# Altium PCB 2Layer_1oz_1mm_100mmX100mm_5mm_rails_2sides.PcbDoc
Units mm, origin at the board's own origin, x right, y up, seen from the top; angles counter-clockwise.
Board outline 100 x 100 mm, 2 copper layers (Top Layer, Bottom Layer), stack 0.97 mm thick; 11 components, 0 nets, 115 pads, 4 vias.
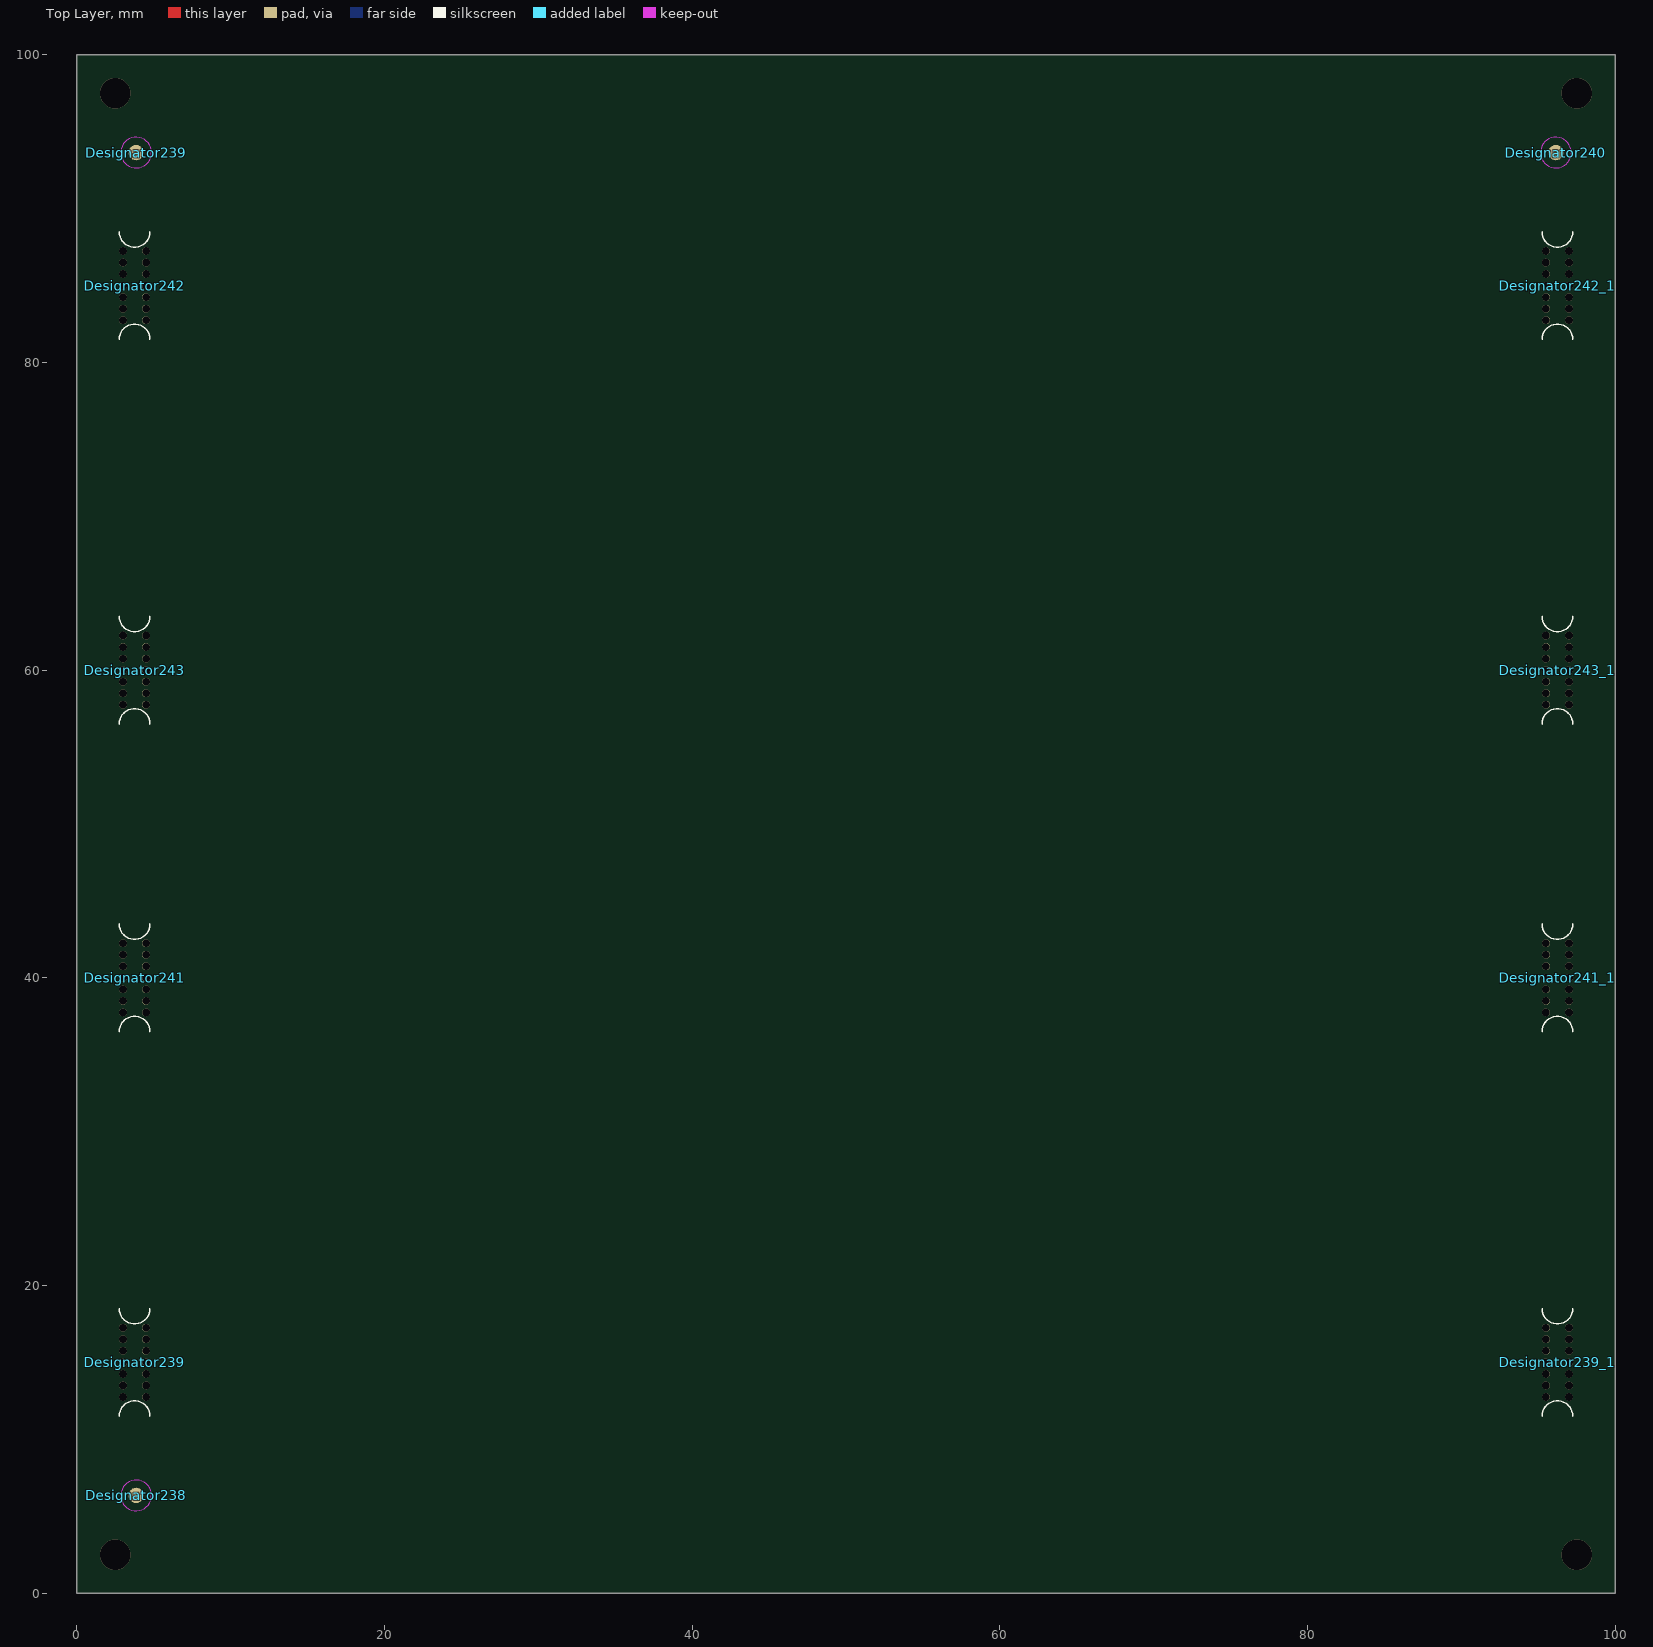
[diagram p0: Top Layer view]
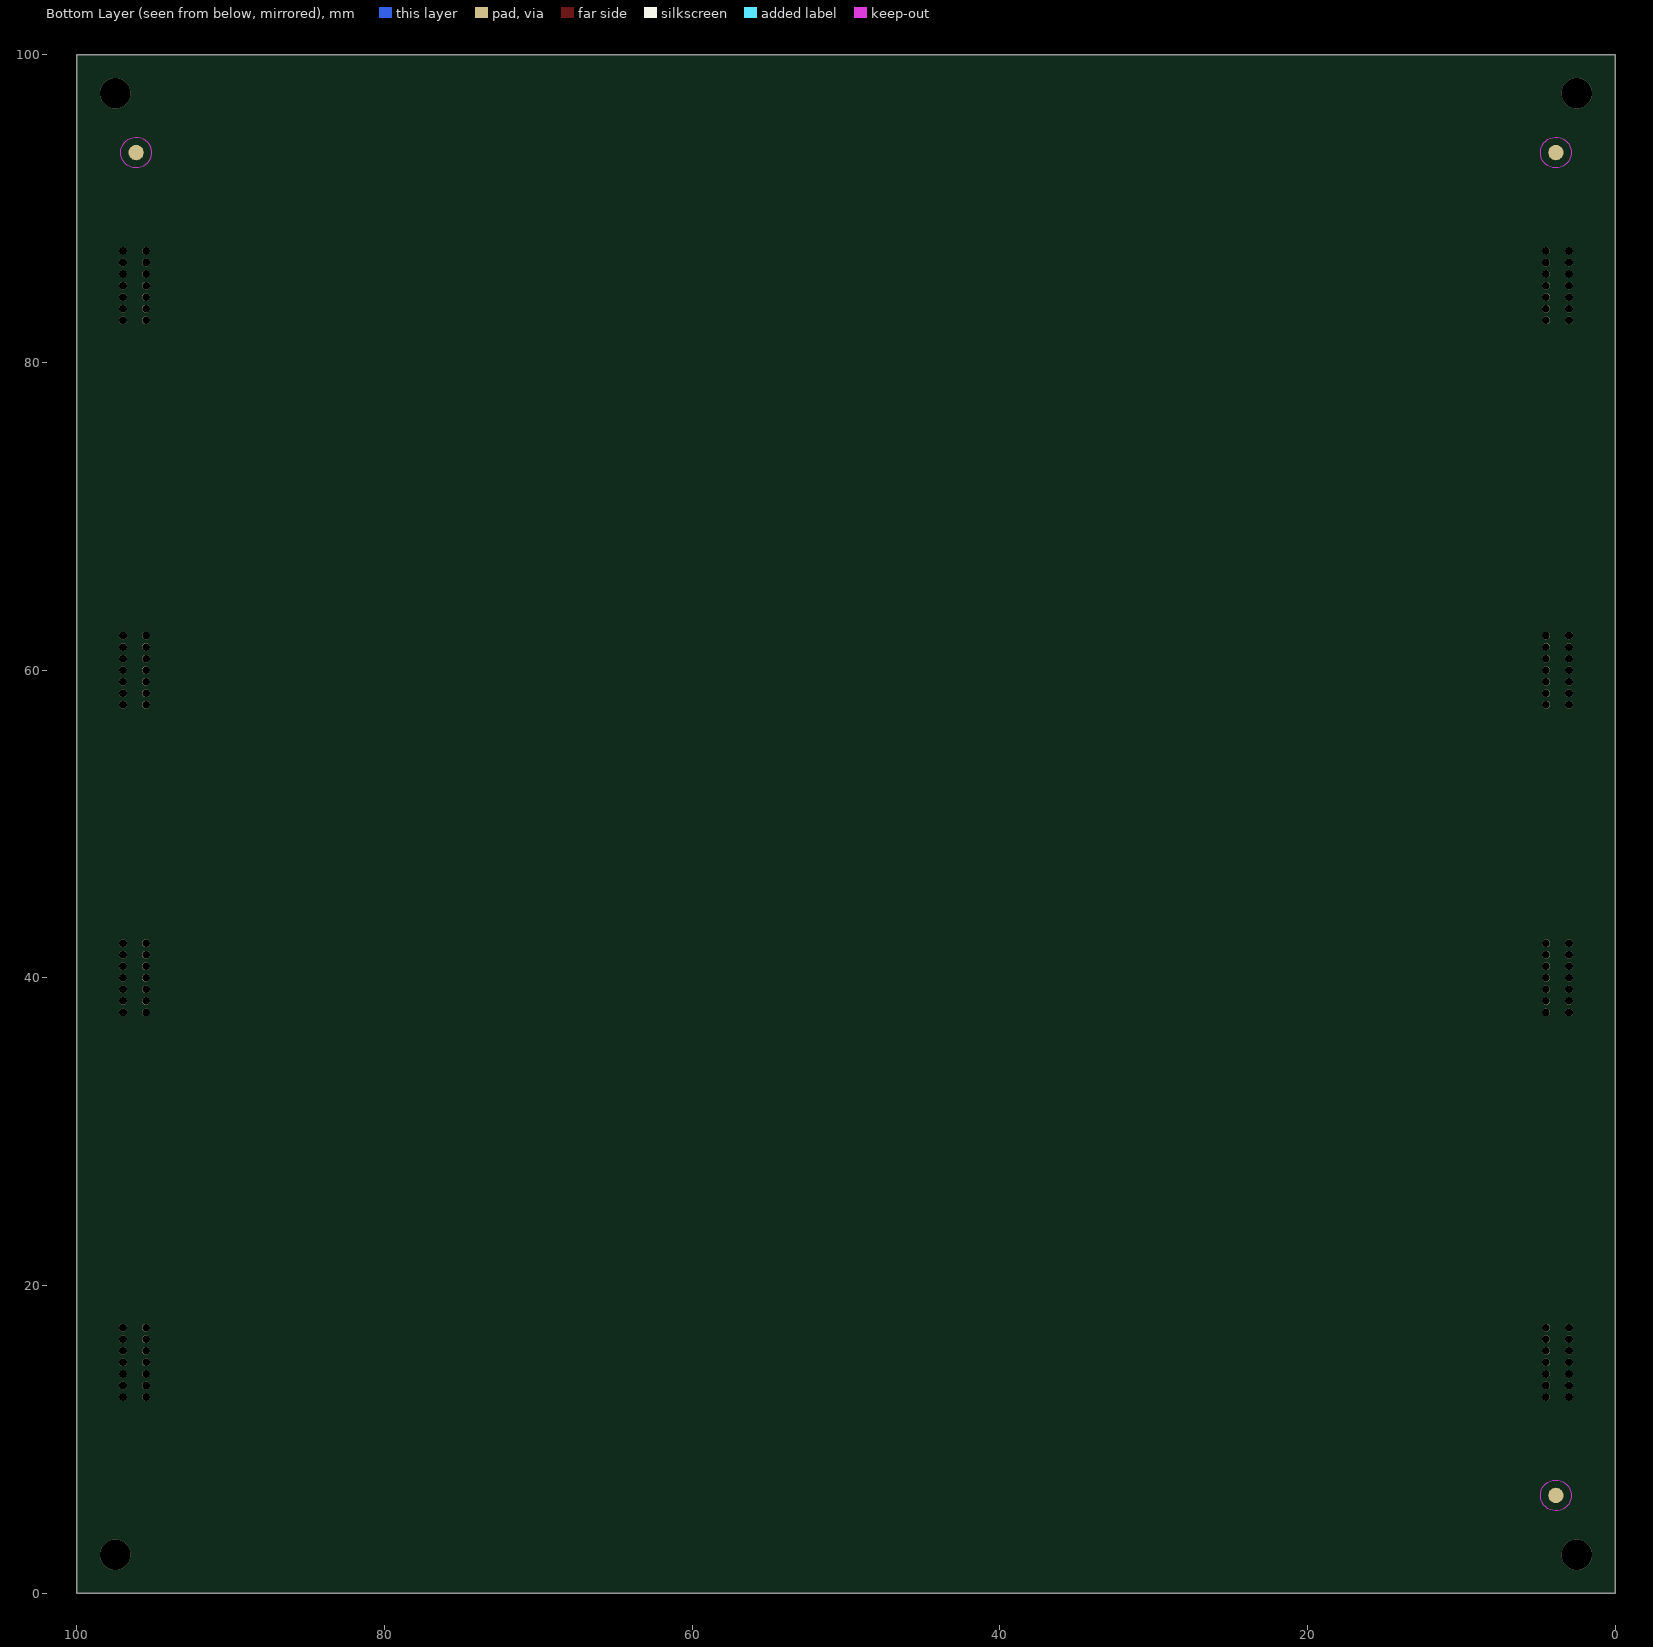
[diagram p1: Bottom Layer view, seen from below]

## Layer stack, top to bottom
Top Solder: solder mask 0.0152, Solder Resist, Dk 3.8
Top Layer: signal copper 0.035
Dielectric: core 0.9, FR-4, Dk 4.6
Bottom Layer: signal copper 0.035
Bottom Solder: solder mask 0.0152, Solder Resist, Dk 3.8

## Board outline
0,0 0,100 100,100 100,0

## Design rules (kind name [scope] priority, off if disabled: settings)
Clearance [All] p1: gap=0.254 ignorepadtopadclearanceinfootprint=FALSE except(0: Arc-Hole Track-Hole SMDPad-Hole THPad-Hole Via-Hole Fill-Hole Poly-Hole Region-Hole Text-Hole)
HoleSize [All] p1: absolutevalues=TRUE maxlimit=6.3 minlimit=0.3 maxpercent=80.000 minpercent=20.000
PolygonConnect [All] p1: connectstyle=Relief reliefconductorwidth=0.254 reliefentries=4 polygonreliefangle="90 Angle" airgapwidth=0.254
RoutingVias [All] p1: holewidth=0.711 width=1.27 viastyle="Through Hole" minholewidth=0.711 minwidth=1.27 maxholewidth=0.711 maxwidth=1.27
SolderMaskExpansion [All] p1: expansion=0.102 istentingtop=FALSE
Width [All] p1: maxlimit=0.254 minlimit=0.254 preferedwidth=0.254
29 further rules are at their usual default settings.

## Components (designator, comment, footprint, x,y, rotation, side; value= is the part's Value field where it differs from the comment)
Designator238 "Comment" FIDUCIAL_1MM_2D_MULTI_LAYER 3.85,6.35 r0 top locked
Designator239 "Comment" mouse-bite-2mm-5mm-slot 3.75,15 r270 top
Designator239 "Comment" FIDUCIAL_1MM_2D_MULTI_LAYER 3.85,93.65 r0 top locked
Designator239_1 "Comment" mouse-bite-2mm-5mm-slot 96.25,15 r270 top
Designator240 "Comment" FIDUCIAL_1MM_2D_MULTI_LAYER 96.15,93.65 r0 top locked
Designator241 "Comment" mouse-bite-2mm-5mm-slot 3.75,40 r270 top
Designator241_1 "Comment" mouse-bite-2mm-5mm-slot 96.25,40 r270 top
Designator242 "Comment" mouse-bite-2mm-5mm-slot 3.75,85 r270 top
Designator242_1 "Comment" mouse-bite-2mm-5mm-slot 96.25,85 r270 top
Designator243 "Comment" mouse-bite-2mm-5mm-slot 3.75,60 r270 top
Designator243_1 "Comment" mouse-bite-2mm-5mm-slot 96.25,60 r270 top

## Footprints (in the part's own frame and the unit in brackets; to place one, negate y for a bottom-side part, rotate by r counter-clockwise, add the part's x,y. Pads: shape width x height; smd on the part's side, far side on the other; paste and mask are expansions set on the pad)
FIDUCIAL_1MM_2D_MULTI_LAYER [mm] "1mm Pad with 0.5mm Opening(mask)"
  round 1 all layers, no hole mask+0.5: 1(0,0)
  Keep-Out Layer circle w0.01: c0,0 r1
mouse-bite-2mm-5mm-slot [mm]
  round 0.5 hole 0.5 unplated: 1(-2.25,0.75) 2(-1.5,0.75) 3(-0.75,0.75) 4(0,0.75) 5(0.75,0.75) 6(1.5,0.75) 7(2.25,0.75) 8(2.25,-0.75) 9(1.5,-0.75) 10(0.75,-0.75) 11(0,-0.75) 12(-0.75,-0.75) 13(-1.5,-0.75) 14(-2.25,-0.75)
  silkscreen extent -3.5,-1 3.5,1

## Via types
v1: diameter 2, hole 2, Top Layer to Bottom Layer, tented both sides, 4 vias

## Nets (pads, with @x,y where several pads share a name; then routed paths per layer and width w, separated by ;. In a path a pad name is that pad's centre, name@x,y a point inside that pad or via, vN(x,y) a via of type N, cw(c..) or ccw(c..) an arc to the next point about the centre after c; other vN are vias at no path point)
pads on no net: Designator238.1 Designator239.1 Designator239.2 Designator239.3 Designator239.4 Designator239.5 Designator239.6 Designator239.7 Designator239.8 Designator239.9 Designator239.10 Designator239.11 Designator239.12 Designator239.13 Designator239.14 Designator239_1.1 Designator239_1.2 Designator239_1.3 Designator239_1.4 Designator239_1.5 Designator239_1.6 Designator239_1.7 Designator239_1.8 Designator239_1.9 Designator239_1.10 Designator239_1.11 Designator239_1.12 Designator239_1.13 Designator239_1.14 Designator240.1 Designator241.1 Designator241.2 Designator241.3 Designator241.4 Designator241.5 Designator241.6 Designator241.7 Designator241.8 Designator241.9 Designator241.10 Designator241.11 Designator241.12 Designator241.13 Designator241.14 Designator241_1.1 Designator241_1.2 Designator241_1.3 Designator241_1.4 Designator241_1.5 Designator241_1.6 Designator241_1.7 Designator241_1.8 Designator241_1.9 Designator241_1.10 Designator241_1.11 Designator241_1.12 Designator241_1.13 Designator241_1.14 Designator242.1 Designator242.2 Designator242.3 Designator242.4 Designator242.5 Designator242.6 Designator242.7 Designator242.8 Designator242.9 Designator242.10 Designator242.11 Designator242.12 Designator242.13 Designator242.14 Designator242_1.1 Designator242_1.2 Designator242_1.3 Designator242_1.4 Designator242_1.5 Designator242_1.6 Designator242_1.7 Designator242_1.8 Designator242_1.9 Designator242_1.10 Designator242_1.11 Designator242_1.12 Designator242_1.13 Designator242_1.14 Designator243.1 Designator243.2 Designator243.3 Designator243.4 Designator243.5 Designator243.6 Designator243.7 Designator243.8 Designator243.9 Designator243.10 Designator243.11 Designator243.12 Designator243.13 Designator243.14 Designator243_1.1 Designator243_1.2 Designator243_1.3 Designator243_1.4 Designator243_1.5 Designator243_1.6 Designator243_1.7 Designator243_1.8 Designator243_1.9 Designator243_1.10 Designator243_1.11 Designator243_1.12 Designator243_1.13 Designator243_1.14
copper on no net:
  other v1: 2.5,2.5 97.5,2.5 2.5,97.5 97.5,97.5

## Silkscreen, mask and mechanical layers (free items; w line width, h text height)
Top Overlay:
  text "Working Area  / 90mm X 100 MM" at 33.5,101.75 h5
Mechanical 7:
  the board outline again, w0.2
Mechanical 7 (Mech7):
  lines w0.254: 5,-10 5,110 ; 95,-10 95,110
  text "Edge Rails" at 95.438,108.75 h1 r270
  text "Edge Rails" at 4.812,105.135 h1 r90
  text "Edge Rails" at 95.438,-1.25 h1 r270
  text "Edge Rails" at 4.812,-5.25 h1 r90

## Dimensions
100,100 to 100,0 on Top Overlay
5,95 to 95,95 on Top Overlay
3.85,6.35 to -5,0 on Top Overlay
0,94 to 3.85,93.65 on Top Overlay
3.85,93.65 to 2.5,97.5 on Top Overlay
95,110 to 100,100 on Top Overlay
0,0 to 100,0 on Top Overlay
0,0 to 0,100 on Top Overlay